# Altium PCB tempsensor.PcbDoc (part 2 of 2)
Units mil, origin at the board's own origin, x right, y up, seen from the top; angles counter-clockwise.
Board outline 1000.01 x 1200 mil, 2 copper layers (Top Layer, Bottom Layer), stack 0.552 mil thick; 55 components, 23 nets, 168 pads, 88 vias.
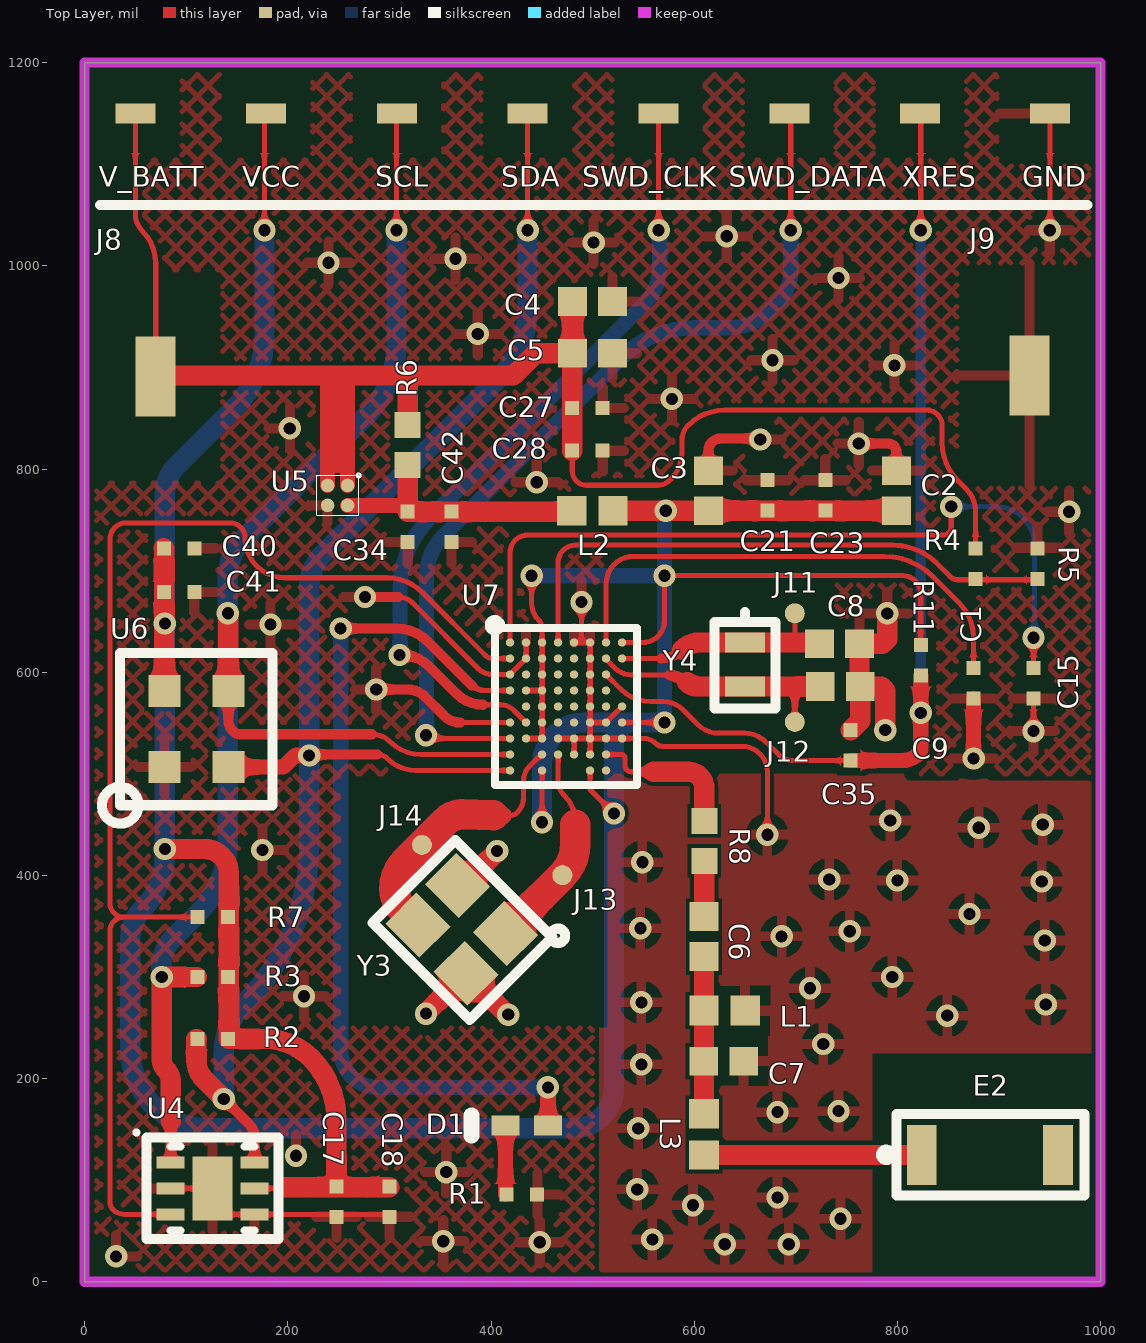
[diagram p0: Top Layer view]

## Via types
v1: diameter 22, hole 12, Top Layer to Bottom Layer, 88 vias

## Nets (pads, with @x,y where several pads share a name; then routed paths per layer and width w, separated by ;. In a path a pad name is that pad's centre, name@x,y a point inside that pad or via, vN(x,y) a via of type N, cw(c..) or ccw(c..) an arc to the next point about the centre after c; other vN are vias at no path point) (continued)
XTAL_LF_P: (continued)
  Top Layer w5: U7.B8 567.47,613.5 ; 699,629.25 J11.1 ; C8.1@722.23,629.25 ccw(c722.23,631.81) C8.1@724.04,630
  Top Layer w10: 567.47,613.5 ccw(c567.47,642.53) 588,622
  Top Layer w20: 588,622 cw(c605.51,604.49) 605.51,629.25 Y4.1 699,629.25 722.23,629.25 C8.1@724.04,629.25
pads on no net: E2.2 U7.B4 U7.B5 U7.C2 U7.C4 U7.C5 U7.D4 U7.D5 U7.D7 U7.E2 U7.E4 U7.E5 U7.E7 U7.F4 U7.F5 U7.J7

## Polygon pours and split planes (outlines as drawn)
GND on Top Layer "RF_GND_TOP" (solid, remove dead copper, pour order 1012): 500,0 500,500 1000,500 1000,0
GND on Top Layer "GND_TOP" (hatched 45Degree grid 15 track 5, remove dead copper, pour order 1004): 0,0 0,1200 1000,1200 1000,500 500,500 500,0
GND on Bottom Layer "GND_BOTTOM" (hatched 45Degree grid 15 track 5, remove dead copper, pour order 1008): 0,0 0,1200 1000,1200 1000,500 500,500 500,0
GND on Bottom Layer "RF_GND_BOTTOM" (solid, remove dead copper, pour order 1016): 500,0 500,500 1000,500 1000,0

## Keep-outs
Keep-Out Layer:
  the board outline again, w10

## Other copper
Top Layer:
  rectangle net V_BATT: 239.16,796 259,892
  pour cut-out: 572,695 740,695 740,540 570.8,540 570.8,550.5
  pour cut-out: 1000,0 775,0 775,225 1000,225
  pour cut-out: 515,500 250,500 250,250 515,250
Bottom Layer:
  pour cut-out: 1000,0 775,0 775,225 1000,225

## Silkscreen, mask and mechanical layers (free items; w line width, h text height)
Top Overlay:
  lines w10: 15,1060 987,1060
Mechanical 1:
  lines w3.94: 0,1000 0,-0.06 1000,-0.06 1000,1000
  lines w4: 0,1000 1000,1000
Mechanical 3:
  the board outline again, w10